# EAGLE board Schematic (EAGLE 8.6.0)
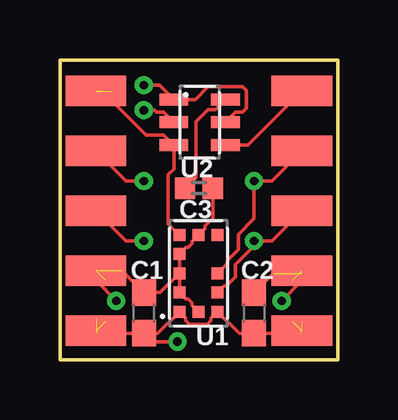
[diagram p0: board, top side]
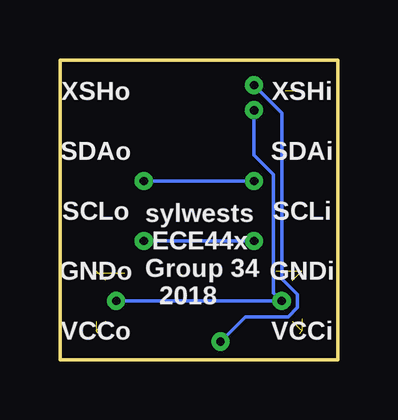
[diagram p1: board, bottom side, seen from below]

Size 11.6 x 12.5 mm. Coordinates in mm from the lower left corner, seen from the top.
Outline: 0,0 11.6,0 11.6,12.5 0,12.5 0,0
Copper layers (1*16): Top 0.035mm / dielectric 1.5mm / Bottom 0.035mm
Design rules "default *": minimum track width 6mil, minimum drill 0.35mm, track to track 6mil, track to pad 6mil, pad to pad 6mil, via to via 8mil, smd to smd 6mil, copper to edge 6mil, drill to drill 6mil, minimum pad ring 10mil, minimum via ring 8mil, stop-mask expansion 4mil, vias tented up to drill 0mil, thermal gap 10mil
Net classes: 0 default: clearance 0.205 mm

## Footprints (pad centres in the part's own frame; a part is rotated, then mirrored left to right if it is on the bottom)
0603 = smd 1.1 x 1: 1 -0.85,0; 2 0.85,0
0402 = smd 0.85 x 0.9: 1 -0.58,0; 2 0.58,0
SMD1,27-2,54 = smd 1.27 x 2.54: 1 0,0
OPTICAL_LGA12 = smd 0.5 x 0.5: 1 -0.8,-1.6; 2 -0.8,-0.8; 3 -0.8,0; 4 -0.8,0.8; 5 -0.8,1.6; 6 0,1.6; 7 0.8,1.6; 9 0.8,0; 10 0.8,-0.8; 11 0.8,-1.6; 12 0,-1.6
6-THIN-SOT23 = smd 1.2 x 0.5: 1 0.55,2.15; 2 0.55,1.2; 3 0.55,0.25; 4 2.7,0.25; 5 2.7,1.2; 6 2.7,2.15

## Placement (x,y rotation side)
C1  4.7uF  [0603]  3.5,1.95 270 top
C2  100nF  [0603]  8.1,1.95 270 top
C3  7.5nF  [0402]  5.8,7.15 180 top
GND_I  [SMD1,27-2,54]  1.5,3.7 270 top
GND_O  [SMD1,27-2,54]  10.1,3.7 270 top
SCL_I  [SMD1,27-2,54]  1.5,6.2 270 top
SCL_O  [SMD1,27-2,54]  10.1,6.2 270 top
SDA_I  [SMD1,27-2,54]  1.5,8.7 270 top
SDA_O  [SMD1,27-2,54]  10.1,8.7 270 top
U1  VL53L0X  [OPTICAL_LGA12]  5.78,3.6 0 top
U2  MAX6895AAZT+T  [6-THIN-SOT23]  4.2,8.7 0 top
VCC_I  [SMD1,27-2,54]  1.5,1.2 270 top
VCC_O  [SMD1,27-2,54]  10.1,1.2 270 top
XSHUT_I  [SMD1,27-2,54]  1.5,11.2 270 top
XSHUT_O  [SMD1,27-2,54]  10.1,11.2 270 top

## Library data of the parts
C1 = SparkFun-Capacitors; PROD_ID: CAP-08280
C2 = SparkFun-Capacitors; PROD_ID: CAP-08604
C3 = SparkFun-Capacitors; PROD_ID: CAP-13458
GND_I GND_O SCL_I SCL_O SDA_I SDA_O VCC_I VCC_O XSHUT_I XSHUT_O = wirepad
U1 U2 = SeanSylwester

## Nets
CDELAY: C3.2 U2.6
GND: C1.1 C2.1 C3.1 GND_I.1 GND_O.1 U1.2 U1.3 U1.4 U1.6 U1.12 U2.2
SCL: SCL_I.1 SCL_O.1 U1.10
SDA: SDA_I.1 SDA_O.1 U1.9
VCC: C1.2 C2.2 U1.1 U1.11 U2.1 U2.5 VCC_I.1 VCC_O.1
XSHUT_I: U1.5 U2.3 XSHUT_I.1
XSHUT_O: U2.4 XSHUT_O.1

## Tracks (layer width: path | path; a pad name or v marks a point on that pad's centre or on a via)
CDELAY
  Top 0.152: C3.2 5.67,7.6 5.67,9.92 6.18,10.43 6.48,10.43 U2.6
GND  (via drill 0.35)  (5 unrouted)
  Top 0.152: U1.3 U1.4 5.25,4.67 5.35,4.67 5.51,4.83 5.51,4.93 U1.6 6.05,5.47 6.05,5.57 6.38,5.9 C3.1 | U1.3 U1.2 5.25,2.53 5.35,2.53 5.51,2.37 5.51,2.27 U1.12 | v2.35,2.45 1.5,3.3 GND_I.1 | v9.25,2.45 10.1,3.3 GND_O.1 | v3.5,10.4 3.95,10.4 4.03,10.32 4.33,10.32 U2.2 | 2.6,3.7 C1.1 4.18,2.8 U1.3 | C2.1 8.9,3.6
  Bottom 0.152: v9.25,2.45 v2.35,2.45 2.69,2.79 2.69,7.72 3.5,8.53 v3.5,10.4
SCL  (via drill 0.35)
  Top 0.152: v3.5,4.95 2.75,4.95 SCL_I.1 | SCL_O.1 8.85,4.95 v8.1,4.95 8.1,4.75 7.32,3.97 7.32,3.44 6.95,3.07 6.85,3.07 U1.10
  Bottom 0.152: v3.5,4.95 v8.1,4.95
SDA  (via drill 0.35)
  Top 0.152: v3.5,7.45 2.75,7.45 SDA_I.1 | SDA_O.1 8.85,7.45 v8.1,7.45 8.1,5.88 7.44,5.22 7.44,4.59 6.96,4.12 6.96,3.98 U1.9
  Bottom 0.152: v3.5,7.45 v8.1,7.45
VCC  (via drill 0.35)  (6 unrouted)
  Top 0.152: U2.5 7.32,10.32 7.62,10.32 7.78,10.48 7.78,11.22 7.62,11.38 6.18,11.38 5.65,10.85 U2.1 4.15,11.45 v3.5,11.45 | 3.4,1.2 C1.2 | C1.2 3.55,1.1 | 3.55,1.1 4.08,1.1 U1.1 5.25,1.73 5.25,1.63 5.41,1.47 6.15,1.47 6.31,1.63 6.31,1.73 U1.11 7.48,1.1 C2.2 10,1.1 | C1.2 1.6,1.1 | v4.9,0.75 3.9,0.75 3.55,1.1
  Bottom 0.152: v3.5,11.45 2.33,10.28 2.33,3.37 1.69,2.72 1.69,2.18 2.08,1.79 3.86,1.79 v4.9,0.75
XSHUT_I  (2 unrouted)
  Top 0.152: U1.5 4.51,5.67 4.51,7.72 4.75,7.95 U2.3 4.33,9.37 3.6,9.37 1.77,11.2
XSHUT_O
  Top 0.152: U2.4 7.85,8.95 XSHUT_O.1

## Text on the board
tPlace: U2 | C3 | C1 | C2 | U1
bPlace: XSHi | XSHo | SDAi | SDAo | SCLi | SCLo | GNDi | GNDo | sylwests / ECE44x / Group 34 / 2018 | VCCi | VCCo